# Altium PCB PCB_SonarMotorDriver.PcbDoc
Units mm, origin at the board's own origin, x right, y up, seen from the top; angles counter-clockwise.
Board outline 40 x 30 mm, 2 copper layers (Top Layer, Bottom Layer), stack 1.569 mm thick; 22 components, 17 nets, 155 pads, 4 vias.
Unrouted connection lines stored in the file: 49.
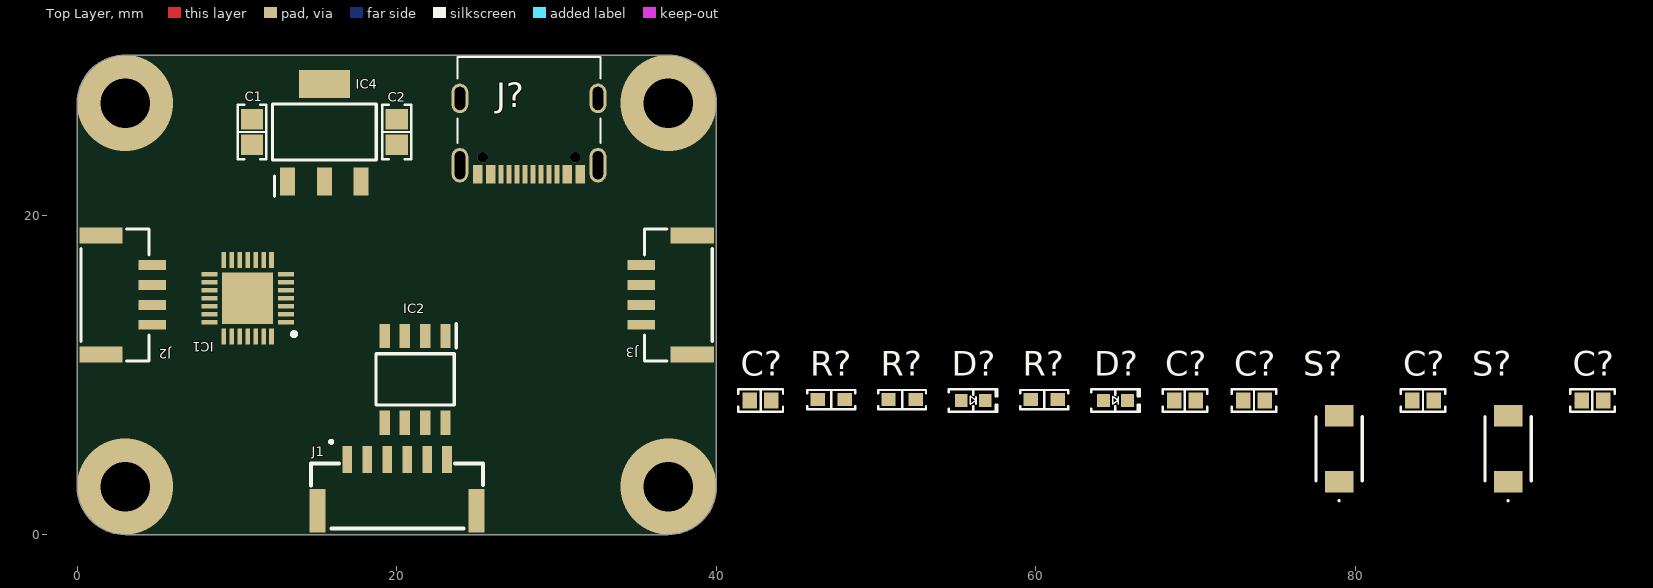
[diagram p0: Top Layer view]
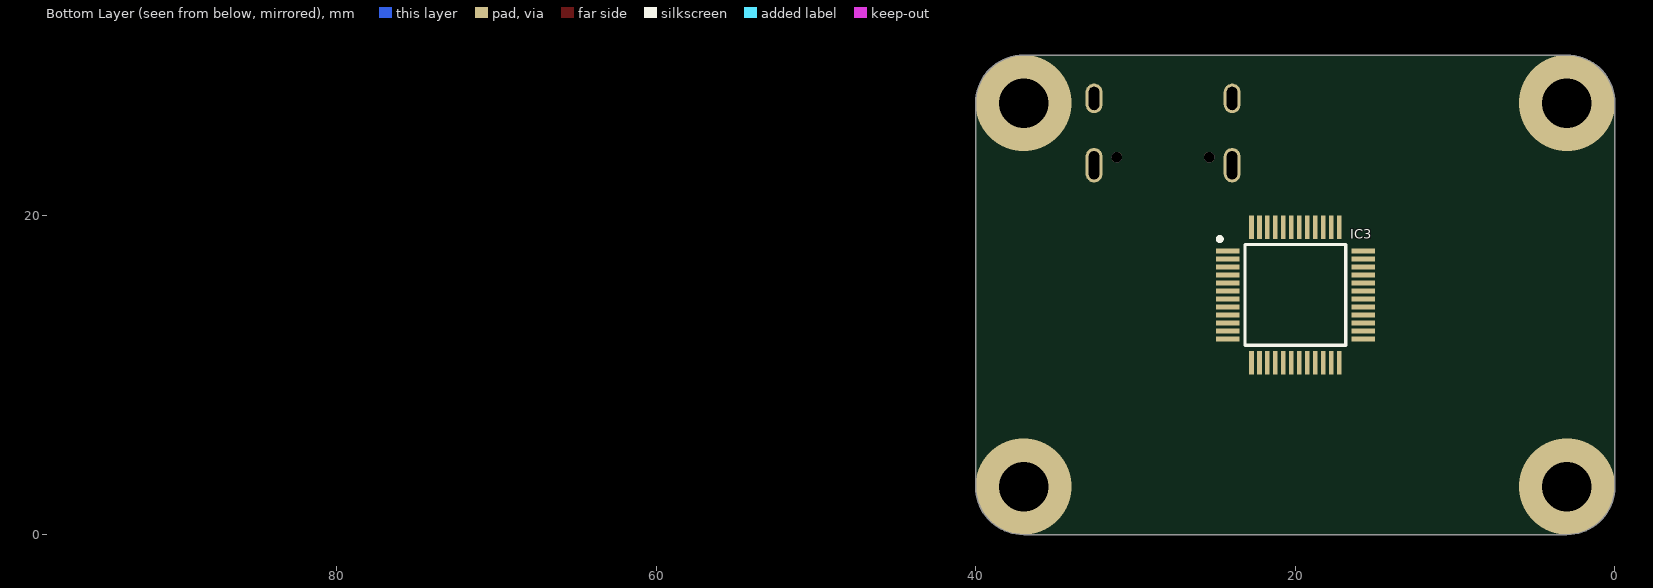
[diagram p1: Bottom Layer view, seen from below]

## Layer stack, top to bottom
Top Solder: solder mask 0.0254, SM-001, Dk 4
Top Layer: signal copper 0.035
Dielectric 1: core 1.4986, Core-043, Dk 4.3
Bottom Layer: signal copper 0.035
Bottom Solder: solder mask 0.0254, SM-001, Dk 4

## Board outline
3.006,0.006 cw(c3.006,3.006) 0.006,3.006 0.006,27.006 cw(c3.006,27.006) 3.006,30.006 37.006,30.006 cw(c37.006,27.006) 40.006,27.006 40.006,3.006 cw(c37.006,3.006) 37.006,0.006

## Design rules (kind name [scope] priority, off if disabled: settings)
Clearance [All] p1: gap=0.254 ignorepadtopadclearanceinfootprint=FALSE
PolygonConnect [All] p1: connectstyle=Relief reliefconductorwidth=0.254 reliefentries=4 polygonreliefangle="90 Angle" airgapwidth=0.254
RoutingVias [All] p1: holewidth=0.711 width=1.27 viastyle="Through Hole" minholewidth=0.711 minwidth=1.27 maxholewidth=0.711 maxwidth=1.27
SolderMaskExpansion [All] p1: expansion=0.102 istentingtop=FALSE
SupplyNets "Schematic Supply Nets_2" [InNet('+3.3')] p1: voltage=0.000
SupplyNets "Schematic Supply Nets_1" [InNet('VCC')] p2: voltage=0.000
SupplyNets "Schematic Supply Nets" [InNet('GND')] p3: voltage=0.000
Width [All] p1: maxlimit=0.254 minlimit=0.254 preferedwidth=0.254
30 further rules are at their usual default settings.

## Classes and differential pairs
component class Sheet_SonarMotorDriver: C1 C2 C? D? IC1 IC2 IC3 IC4 J1 J2 J3 J? R? S?

## Components (designator, comment, footprint, x,y, rotation, side; value= is the part's Value field where it differs from the comment)
C1 "10 µF" "CAP 0805_2012" 10.95,25.2 r90 top
C2 "10 µF" "CAP 0805_2012" 20,25.2 r270 top
C? "0.1 µF" "CAP 0603_1608" 94.828,8.404 r0 top
C? "0.1 µF" "CAP 0603_1608" 69.327,8.404 r0 top
C? "0.1 µF" "CAP 0603_1608" 84.227,8.404 r0 top
C? "0.1 µF" "CAP 0603_1608" 73.652,8.404 r0 top
C? "0.1 µF" "CAP 0603_1608" 42.775,8.404 r0 top
D? "Blue" "LED 0603_1608 BLUE" 64.976,8.404 r0 top
D? "Blue" "LED 0603_1608 BLUE" 56.076,8.404 r0 top
IC1 "TMC2208-LA-T" QFN50P500X500X90-29N-D 10.675,14.8 r180 top
IC2 "THVD1451D" SOIC127P600X175-8N 21.15,9.725 r270 top
IC3 "STM32F103C8T6XXXTR" QFP50P900X900X160-48N 20,15 r180 bottom
IC4 "NCV1117ST33T3G" SOT230P700X180-4N 15.475,25.2 r90 top
J1 "SM06B-GHS-TB" SM06B-GHS-TB 14.65,0.4 r0 top
J2 "SM04B-GHS-TB" SM04B-GHS-TB 4.5,15 r270 top
J3 "SM04B-GHS-TB_LF__SN_" SM04B-GHS-TB 35.5,15 r90 top
J? "10155435-00011LF" AMPHENOL_10155435-00011LF 28.275,27.3 r180 top
R? "120 Ohms" "YAGEO RES 0603_1608" 47.201,8.454 r0 top
R? "510 Ohms" "YAGEO RES 0603_1608" 60.526,8.454 r0 top
R? "510 Ohms" "YAGEO RES 0603_1608" 51.626,8.454 r0 top
S? "TS-1088-AR02016" TS1088AR02016 89.553,5.379 r90 top
S? "TS-1088-AR02016" TS1088AR02016 78.977,5.379 r90 top

## Footprints (in the part's own frame and the unit in brackets; to place one, negate y for a bottom-side part, rotate by r counter-clockwise, add the part's x,y. Pads: shape width x height; smd on the part's side, far side on the other; paste and mask are expansions set on the pad)
AMPHENOL_10155435-00011LF [mm]
  rect 0.6x1.15 smd: A1_B12(-3.2,4.745) A4_B9(-2.4,4.745) B1_A12(3.2,4.745) B4_A9(2.4,4.745)
  rect 0.3x1.15 smd: A5(-1.25,4.745) A6(-0.25,4.745) A7(0.25,4.745) A8(1.25,4.745) B5(1.75,4.745) B6(0.75,4.745) B7(-0.75,4.745) B8(-1.75,4.745)
  oval 1.05x2.15 hole 0.65 slot 1.75 at 90 deg: SH1(-4.32,4.18) SH2(4.32,4.18)
  oval 1.05x1.85 hole 0.65 slot 1.45 at 90 deg: SH3(-4.32,0) SH4(4.32,0)
  round 0.65 hole 0.65 unplated: ""(-2.89,3.68) ""(2.89,3.68)
  silkscreen extent -4.47,-2.6 4.47,2.79, body extent -4.47,-2.6 4.47,5, height 3.26
"CAP 0603_1608" [mm] "Chip Capacitor, 2-Leads, Body 1.60x0.80mm, IPC Medium Density"
  rect 0.9x1 smd: 1(-0.675,0) 2(0.675,0)
  silkscreen extent -1.4,-0.7 1.4,0.7, body extent -0.8,-0.41 0.8,0.41, height 0.82
"CAP 0805_2012" [mm] "Chip Capacitor, 2-Leads, Body 2.00x1.20mm, IPC Medium Density"
  rect 1.3x1.4 smd: 1(-0.8,0) 2(0.8,0)
  silkscreen extent -1.7,-0.9 1.7,0.9, body extent -1,-0.64 1,0.64, height 1.26
"LED 0603_1608 BLUE" [mm] "Chip Diode, 2-Leads, Body 1.60x0.80mm, IPC Medium Density"
  rect 0.8x0.8 smd: 1(-0.75,0) 2(0.75,0)
  silkscreen extent -1.52,-0.7 1.52,0.7, body extent -0.8,-0.4 0.8,0.4, height 0.53
QFN50P500X500X90-29N-D [mm]
  rect 1x0.3 smd: 1(-2.4,1.5) 2(-2.4,1) 3(-2.4,0.5) 4(-2.4,0) 5(-2.4,-0.5) 6(-2.4,-1) 7(-2.4,-1.5) 15(2.4,-1.5) 16(2.4,-1) 17(2.4,-0.5) 18(2.4,0) 19(2.4,0.5) 20(2.4,1) 21(2.4,1.5)
  rect 0.3x1 smd: 8(-1.5,-2.4) 9(-1,-2.4) 10(-0.5,-2.4) 11(0,-2.4) 12(0.5,-2.4) 13(1,-2.4) 14(1.5,-2.4) 22(1.5,2.4) 23(1,2.4) 24(0.5,2.4) 25(0,2.4) 26(-0.5,2.4) 27(-1,2.4) 28(-1.5,2.4)
  rect 3.2x3.2 smd: 29(0,0)
  silkscreen extent -3.03,2.13 -2.78,2.37, body extent -2.55,-2.55 2.55,2.55, height 0.9
QFP50P900X900X160-48N [mm]
  rect 1.475x0.3 smd: 1(-4.238,2.75) 2(-4.238,2.25) 3(-4.238,1.75) 4(-4.238,1.25) 5(-4.238,0.75) 6(-4.238,0.25) 7(-4.238,-0.25) 8(-4.238,-0.75) 9(-4.238,-1.25) 10(-4.238,-1.75) 11(-4.238,-2.25) 12(-4.238,-2.75) 25(4.238,-2.75) 26(4.238,-2.25) 27(4.238,-1.75) 28(4.238,-1.25) 29(4.238,-0.75) 30(4.238,-0.25) 31(4.238,0.25) 32(4.238,0.75) 33(4.238,1.25) 34(4.238,1.75) 35(4.238,2.25) 36(4.238,2.75)
  rect 0.3x1.475 smd: 13(-2.75,-4.238) 14(-2.25,-4.238) 15(-1.75,-4.238) 16(-1.25,-4.238) 17(-0.75,-4.238) 18(-0.25,-4.238) 19(0.25,-4.238) 20(0.75,-4.238) 21(1.25,-4.238) 22(1.75,-4.238) 23(2.25,-4.238) 24(2.75,-4.238) 37(2.75,4.238) 38(2.25,4.238) 39(1.75,4.238) 40(1.25,4.238) 41(0.75,4.238) 42(0.25,4.238) 43(-0.25,4.238) 44(-0.75,4.238) 45(-1.25,4.238) 46(-1.75,4.238) 47(-2.25,4.238) 48(-2.75,4.238)
  silkscreen extent -4.85,-3.15 3.15,3.62, body extent -4.5,-4.5 4.5,4.5, height 1.6
SM04B-GHS-TB [mm]
  rect 0.6x1.7 smd: 1(-1.875,0.2) 2(-0.625,0.2) 3(0.625,0.2) 4(1.875,0.2)
  rect 1x2.7 smd: 5(-3.725,-3) 6(3.725,-3)
  silkscreen extent -4.13,-4.25 4.13,0, body extent -4.12,-4.13 4.13,0.72, height 4.45
SM06B-GHS-TB [mm]
  rect 0.6x1.7 smd: 1(2.25,4.3) 2(3.5,4.3) 3(4.75,4.3) 4(6,4.3) 5(7.25,4.3) 6(8.5,4.3)
  rect 1x2.7 smd: 7(0.4,1.1) 8(10.35,1.1)
  silkscreen extent 0,0 10.75,5.47, body extent 0,-0.07 10.75,4.78, height 4.25
SOIC127P600X175-8N [mm]
  rect 1.525x0.65 smd: 1(-2.712,1.905) 2(-2.712,0.635) 3(-2.712,-0.635) 4(-2.712,-1.905) 5(2.712,-1.905) 6(2.712,-0.635) 7(2.712,0.635) 8(2.712,1.905)
  silkscreen extent -3.47,-2.45 1.6,2.58, body extent -3,-2.45 3,2.45, height 1.75
SOT230P700X180-4N [mm]
  rect 1.75x0.95 smd: 1(-3.1,2.3) 2(-3.1,0) 3(-3.1,-2.3)
  rect 1.75x3.2 smd: 4(3,0)
  silkscreen extent -4.03,-3.25 1.75,3.25, body extent -3.5,-3.25 3.5,3.25, height 1.8
TS1088AR02016 [mm]
  rect 1.35x1.8 smd: 1(-2.075,0) 2(2.075,0)
  silkscreen extent -3.3,-1.45 2,1.45, body extent -2.62,-1.45 2.62,1.45, height 2.1
"YAGEO RES 0603_1608" [mm] "Chip Resistor, 2-Leads, Body 1.60x0.80mm"
  rect 0.9x0.8 smd: 1(-0.85,0) 2(0.85,0)
  silkscreen extent -1.5,-0.6 1.5,0.6, body extent -0.8,-0.4 0.8,0.4, height 0.45

## Part data
C1 C2: library part CL21A106KOQNNNE, "CAP CER 10UF 16V X5R 0805", Device Package="0805 (2012 Metric)", manufacturer="Samsung Electro-Mechanics", Operating Temperature="-55°C ~ 85°C", Supplier Part Number 1=1276-1096-1-ND, Temperature Coefficient=X5R, Tolerance=±10%, Voltage - Rated=16V, Applications="General Purpose", Capacitance="10 µF", componentlink1description=Datasheet, componentlink1url=http://www.samsungsem.com/kr/support/product-search/mlcc/CL21A106KOQNNNE.jsp, componentlink2description="DigiKey Link", componentlink2url=https://www.digikey.com/en/products/detail/samsung-electro-mechanics/CL21A106KOQNNNE/3886754, lastupdated="09.02.2024 20:15:37", Lifecycle Status=Active, Minimum Order=1, Mounting Type="Surface Mount, MLCC", Package / Case="0805 (2012 Metric)", packaging=TapeAndReel, Part Number=CL21A106KOQNNNE, Part Status=Active, partid=14297, price=0.01, series=CL, Size / Dimension="0.079\" L x 0.049\" W (2.00mm x 1.25mm)", Supplier 1=DigiKey, Thickness (Max)="0.055\" (1.40mm)"
C? C? C? C? C?: library part CC0603KRX7R9BB104, "CAP CER 0.1UF 50V X7R 0603", Device Package="0603 (1608 Metric)", manufacturer=Yageo, Operating Temperature="-55°C ~ 125°C", Supplier Part Number 1=311-1344-1-ND, Temperature Coefficient=X7R, Tolerance=±10%, Voltage - Rated=50V, Applications="General Purpose", Capacitance="0.1 µF", componentlink1description=Datasheet, componentlink1url=https://www.yageo.com/upload/media/product/productsearch/datasheet/mlcc/UPY-GPHC_X7R_6.3V-to-50V_18.pdf, componentlink2description="DigiKey Link", componentlink2url=https://www.digikey.com/en/products/detail/yageo/CC0603KRX7R9BB104/2103082, lastupdated="09.02.2024 20:10:21", Lifecycle Status=Active, Minimum Order=1, Mounting Type="Surface Mount, MLCC", Package / Case="0603 (1608 Metric)", packaging=TapeAndReel, Part Number=CC0603KRX7R9BB104, Part Status=Active, partid=9506, price=0.01, series=CC, Size / Dimension="0.063\" L x 0.031\" W (1.60mm x 0.80mm)", Supplier 1=DigiKey, Thickness (Max)="0.035\" (0.90mm)"
D? D?: library part LSM0603463V, "LED BLUE CLEAR CHIP 0603 SMD", Current - Test=20mA, Device Package="0603 (1608 Metric)", Lens Color=Colorless, manufacturer="Visual Communications Company - VCC", Millicandela Rating=20mcd, Supplier Device Package="Chip LED", Supplier Part Number 1=LSM0603463VCT-ND, Voltage - Forward (Vf) (Typ)=3V, Color=Blue, componentlink1description=Datasheet, componentlink1url=https://vcclite.com/wp-content/uploads/wpallimport/files/files/LSM0603463V.pdf, componentlink2description="DigiKey Link", componentlink2url=https://www.digikey.com/en/products/detail/visual-communications-company-vcc/LSM0603463V/9486725, Configuration=Standard, Height (Max)=0.50mm, lastupdated="03.06.2024 19:57:52", Lens Size="1.20mm x 0.80mm", Lens Style="Rectangle with Flat Top", Lens Transparency=Clear, Lifecycle Status=Active, Minimum Order=1, Mounting Type="Surface Mount", Package / Case="0603 (1608 Metric)", packaging=TapeAndReel, Part Number=LSM0603463V, Part Status=Active, partid=781, price=0.12, series=LSM0603, Size / Dimension="1.60mm L x 0.80mm W", Supplier 1=DigiKey, Viewing Angle=120°, Wavelength - Dominant=469nm, Wavelength - Peak=469nm
IC1: "Integrated Circuit", Manufacturer_Name="Analog Devices", Mouser Part Number=700-TMC2208-LA-T, Arrow Part Number=TMC2208-LA-T, Arrow Price/Stock=https://www.arrow.com/en/products/tmc2208-la-t/analog-devices?utm_currency=USD&region=nac, Datasheet Link=https://www.analog.com/TMC2208/datasheet, Height=0.9mm, Manufacturer_Part_Number=TMC2208-LA-T, Mouser Price/Stock=https://www.mouser.co.uk/ProductDetail/ADI-Trinamic/TMC2208-LA-T?qs=TiOZkKH1s2TUCbyrI5xF3A%3D%3D
IC2: "Integrated Circuit", Manufacturer_Name="Texas Instruments", Mouser Part Number=595-THVD1451D, Arrow Part Number=THVD1451D, Arrow Price/Stock=https://www.arrow.com/en/products/thvd1451d/texas-instruments?utm_currency=USD&region=europe, Datasheet Link=https://www.arrow.com/en/products/thvd1451d/texas-instruments, Height=1.75mm, Manufacturer_Part_Number=THVD1451D, Mouser Price/Stock=https://www.mouser.co.uk/ProductDetail/Texas-Instruments/THVD1451D?qs=9r4v7xj2Lnm01mh13ntUDQ%3D%3D
IC3: "Integrated Circuit", Manufacturer_Name=STMicroelectronics, Datasheet Link=https://4donline.ihs.com/images/VipMasterIC/IC/SGST/SGSTS49413/SGSTS49413-1.pdf?hkey=EF798316E3902B6ED9A73243A3159BB0, Height=1.6mm, Manufacturer_Part_Number=STM32F103C8T6XXXTR
IC4: "Integrated Circuit", Manufacturer_Name=onsemi, Mouser Part Number=863-NCV1117ST33T3G, Arrow Part Number=NCV1117ST33T3G, Arrow Price/Stock=https://www.arrow.com/en/products/ncv1117st33t3g/on-semiconductor?utm_currency=USD&region=europe, Datasheet Link=https://www.onsemi.com/pub/Collateral/NCP1117-D.PDF, Height=1.8mm, Manufacturer_Part_Number=NCV1117ST33T3G, Mouser Price/Stock=https://www.mouser.co.uk/ProductDetail/onsemi/NCV1117ST33T3G?qs=8sOby8ZxZLHgqg5CFzeqiA%3D%3D
J1: library part SM06B-GHS-TB_LF__SN_, "Connector", Arrow Part Number=SM06B-GHS-TB(LF)(SN), Manufacturer_Name="JST (JAPAN SOLDERLESS TERMINALS)", Mouser Part Number=N/A, Arrow Price/Stock=https://www.arrow.com/en/products/sm06b-ghs-tb-lf-sn/jst-manufacturing, Datasheet Link=https://datasheet.datasheetarchive.com/originals/distributors/Datasheets_SAMA/e4ef010dc292ea31091454f6c0afb63a.pdf, Manufacturer_Part_Number=SM06B-GHS-TB(LF)(SN), Mouser Price/Stock=https://www.mouser.co.uk/ProductDetail/JST-Commercial/SM06B-GHS-TBLFSN?qs=QpmGXVUTftFzTQe43vH9Ig%3D%3D
J2: library part SM04B-GHS-TB_LF__SN_, "Connector", Arrow Part Number=SM04B-GHS-TB(LF)(SN), Manufacturer_Name="JST (JAPAN SOLDERLESS TERMINALS)", Mouser Part Number=N/A, Arrow Price/Stock=https://www.arrow.com/en/products/sm04b-ghs-tb-lf-sn-/jst-manufacturing?region=europe, Datasheet Link=http://uk.rs-online.com/web/p/products/7521797, Manufacturer_Part_Number=SM04B-GHS-TB(LF)(SN), Mouser Price/Stock=https://www.mouser.co.uk/ProductDetail/JST-Commercial/SM04B-GHS-TBLFSN?qs=QpmGXVUTftEJzKB1YHGCXw%3D%3D
J3: "Connector", Arrow Part Number=SM04B-GHS-TB(LF)(SN), Manufacturer_Name="JST (JAPAN SOLDERLESS TERMINALS)", Mouser Part Number=N/A, Arrow Price/Stock=https://www.arrow.com/en/products/sm04b-ghs-tb-lf-sn-/jst-manufacturing?region=europe, Datasheet Link=http://uk.rs-online.com/web/p/products/7521797, Manufacturer_Part_Number=SM04B-GHS-TB(LF)(SN), Mouser Price/Stock=https://www.mouser.co.uk/ProductDetail/JST-Commercial/SM04B-GHS-TBLFSN?qs=QpmGXVUTftEJzKB1YHGCXw%3D%3D
J?: Package=None, Availability=Unavailable, MP=10155435-00011LF, price=None
R?: library part RC0603FR-07120RL, "RES 120 OHM 1% 1/10W 0603", Device Package="0603 (1608 Metric)", manufacturer=Yageo, Operating Temperature="-55°C ~ 155°C", Power (Watts)="0.1W, 1/10W", Supplier Device Package=0603, Supplier Part Number 1=311-120HRCT-ND, Temperature Coefficient=±100ppm/°C, Tolerance=±1%, componentlink1description=Datasheet, componentlink1url=https://www.yageo.com/upload/media/product/productsearch/datasheet/rchip/PYu-RC_Group_51_RoHS_L_10.pdf, componentlink2description="DigiKey Link", componentlink2url=https://www.digikey.com/en/products/detail/yageo/RC0603FR-07120RL/726920, Composition="Thick Film", Features="Moisture Resistant", Height - Seated (Max)="0.022\" (0.55mm)", lastupdated="25.07.2024 9:19:21", Lifecycle Status=Active, Minimum Order=1, Number of Terminations=2, Package / Case="0603 (1608 Metric)", packaging=CutTape, Part Number=RC0603FR-07120RL, Part Status=Active, partid=18999, price=0.01, Resistance="120 Ohms", series=RC_L, Size / Dimension="0.063\" L x 0.031\" W (1.60mm x 0.80mm)", Supplier 1=DigiKey
R? R?: library part RC0603FR-07510RL, "RES 510 OHM 1% 1/10W 0603", Device Package="0603 (1608 Metric)", manufacturer=Yageo, Operating Temperature="-55°C ~ 155°C", Power (Watts)="0.1W, 1/10W", Supplier Device Package=0603, Supplier Part Number 1=311-510HRCT-ND, Temperature Coefficient=±100ppm/°C, Tolerance=±1%, componentlink1description=Datasheet, componentlink1url=https://www.yageo.com/upload/media/product/productsearch/datasheet/rchip/PYu-RC_Group_51_RoHS_L_10.pdf, componentlink2description="DigiKey Link", componentlink2url=https://www.digikey.com/en/products/detail/yageo/RC0603FR-07510RL/727285, Composition="Thick Film", Features="Moisture Resistant", Height - Seated (Max)="0.022\" (0.55mm)", lastupdated="25.07.2024 9:19:21", Lifecycle Status=Active, Minimum Order=1, Number of Terminations=2, Package / Case="0603 (1608 Metric)", packaging=CutTape, Part Number=RC0603FR-07510RL, Part Status=Active, partid=18969, price=0.01, Resistance="510 Ohms", series=RC_L, Size / Dimension="0.063\" L x 0.031\" W (1.60mm x 0.80mm)", Supplier 1=DigiKey
S? S?: "Switch", Manufacturer_Name=XUNPU, Datasheet Link=https://www.xunpudianzi.com/uploads/pdf/TS-1088-ARXXX.pdf, Height=2mm, Manufacturer_Part_Number=TS-1088-AR02016

## Via types
v1: diameter 6, hole 3.1, Top Layer to Bottom Layer, 4 vias

## Nets (pads, with @x,y where several pads share a name; then routed paths per layer and width w, separated by ;. In a path a pad name is that pad's centre, name@x,y a point inside that pad or via, vN(x,y) a via of type N, cw(c..) or ccw(c..) an arc to the next point about the centre after c; other vN are vias at no path point)
+3.3: C1.2 C?.2 IC2.1 IC3.24 IC3.36 IC3.48 IC4.2 IC4.4 R?.1@50.776,8.454
GND: C1.1 C2.1 C?.1 D?.2 IC1.3 IC1.18 IC1.29 IC2.4 IC3.8 IC3.23 IC3.35 IC3.47 IC4.1 J1.2 J3.4
  other v1: 3.006,3.006 37.006,3.006 3.006,27.006 37.006,27.006
NetD?_1: D?.1@64.226,8.404 R?.2@61.376,8.454
NetIC2_2: IC2.2 IC3.16
NetIC2_3: IC2.3 IC3.15
NetIC2_5: IC2.5 J1.3
NetIC2_6: IC2.6 J1.4
NetIC2_7: IC2.7 J1.6 R?.1@46.351,8.454
NetIC2_8: IC2.8 J1.5 R?.2@48.051,8.454
NetIC3_2: IC3.2 R?.1@59.676,8.454
NetIC3_30: IC3.30 J3.3
NetIC3_31: IC3.31 J3.2
NetJ2_1: J2.1
NetJ2_2: J2.2
NetJ2_3: J2.3
NetJ2_4: J2.4
VCC: IC4.3 J1.1 J3.1
pads on no net: C2.2 D?.1@55.326,8.404 IC1.1 IC1.2 IC1.4 IC1.5 IC1.6 IC1.7 IC1.8 IC1.9 IC1.10 IC1.11 IC1.12 IC1.13 IC1.14 IC1.15 IC1.16 IC1.17 IC1.19 IC1.20 IC1.21 IC1.22 IC1.23 IC1.24 IC1.25 IC1.26 IC1.27 IC1.28 IC3.1 IC3.3 IC3.4 IC3.5 IC3.6 IC3.7 IC3.9 IC3.10 IC3.11 IC3.12 IC3.13 IC3.14 IC3.17 IC3.18 IC3.19 IC3.20 IC3.21 IC3.22 IC3.25 IC3.26 IC3.27 IC3.28 IC3.29 IC3.32 IC3.33 IC3.34 IC3.37 IC3.38 IC3.39 IC3.40 IC3.41 IC3.42 IC3.43 IC3.44 IC3.45 IC3.46 J1.7 J1.8 J2.5 J2.6 J3.5 J3.6 J?. J?.A1_B12 J?.A4_B9 J?.A5 J?.A6 J?.A7 J?.A8 J?.B1_A12 J?.B4_A9 J?.B5 J?.B6 J?.B7 J?.B8 J?.SH1 J?.SH2 J?.SH3 J?.SH4 R?.2@52.476,8.454 S?.1 S?.2

## Silkscreen, mask and mechanical layers (free items; w line width, h text height)
Mechanical 1:
  circle w0.013: c3.006,3.006 r1.55
  circle w0.013: c37.006,3.006 r1.55
  circle w0.013: c37.006,27.006 r1.55
  circle w0.013: c3.006,27.006 r1.55
  lines w0.013: 0.006,3.006 ccw(c3.006,3.006) 3.006,0.006 37.006,0.006 ccw(c37.006,3.006) 40.006,3.006 40.006,27.006 ccw(c37.006,27.006) 37.006,30.006 3.006,30.006 ccw(c3.006,27.006) 0.006,27.006 0.006,3.006